# EAGLE board stereo_mix_back_digital (EAGLE 9.6.1), part 1 of 2
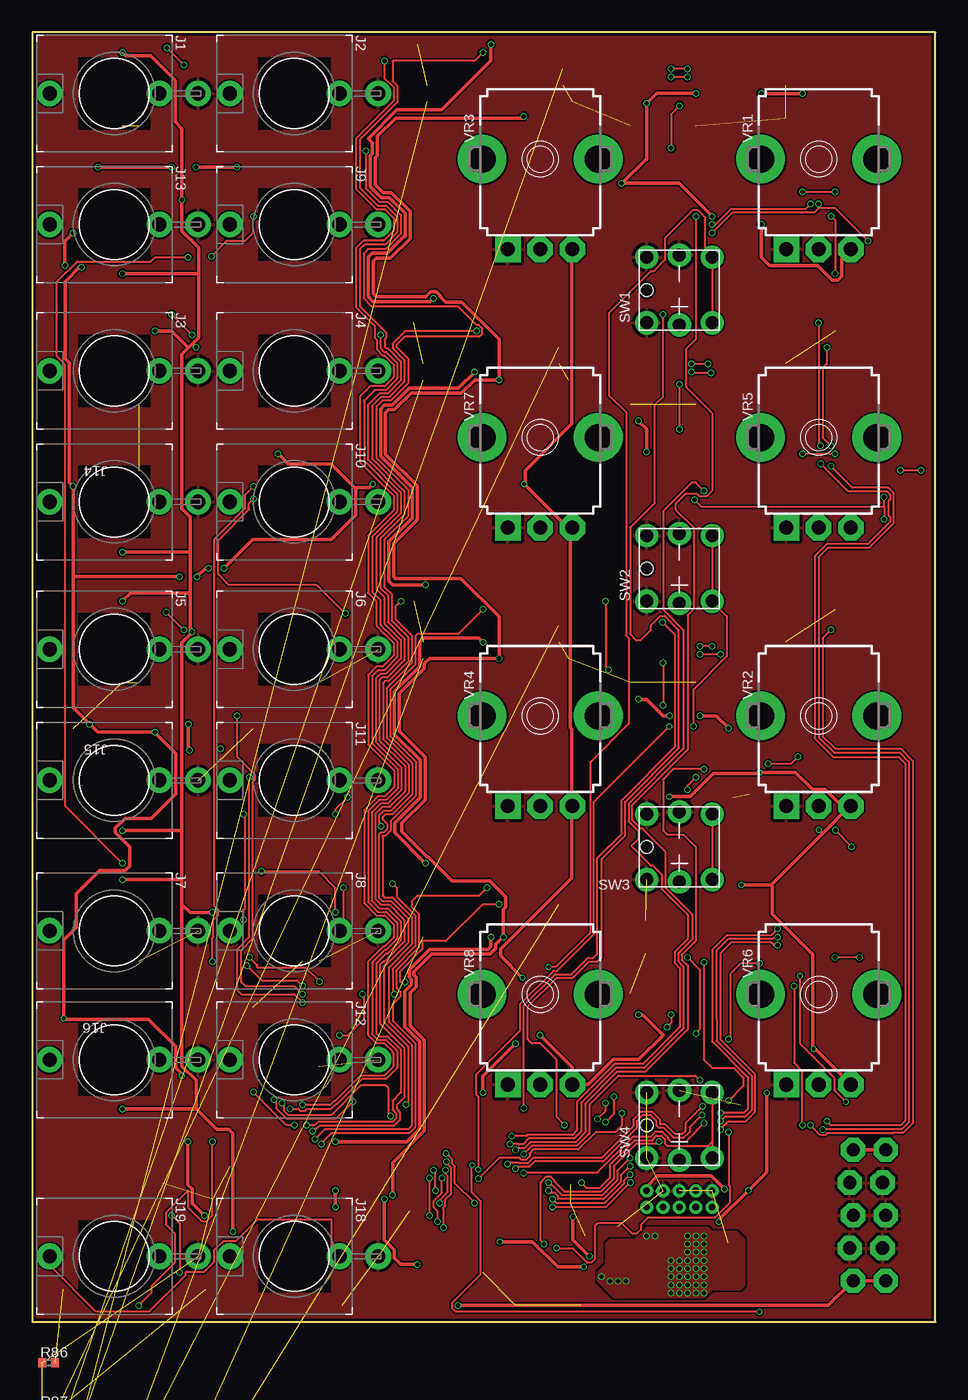
[diagram p0: board, top side]
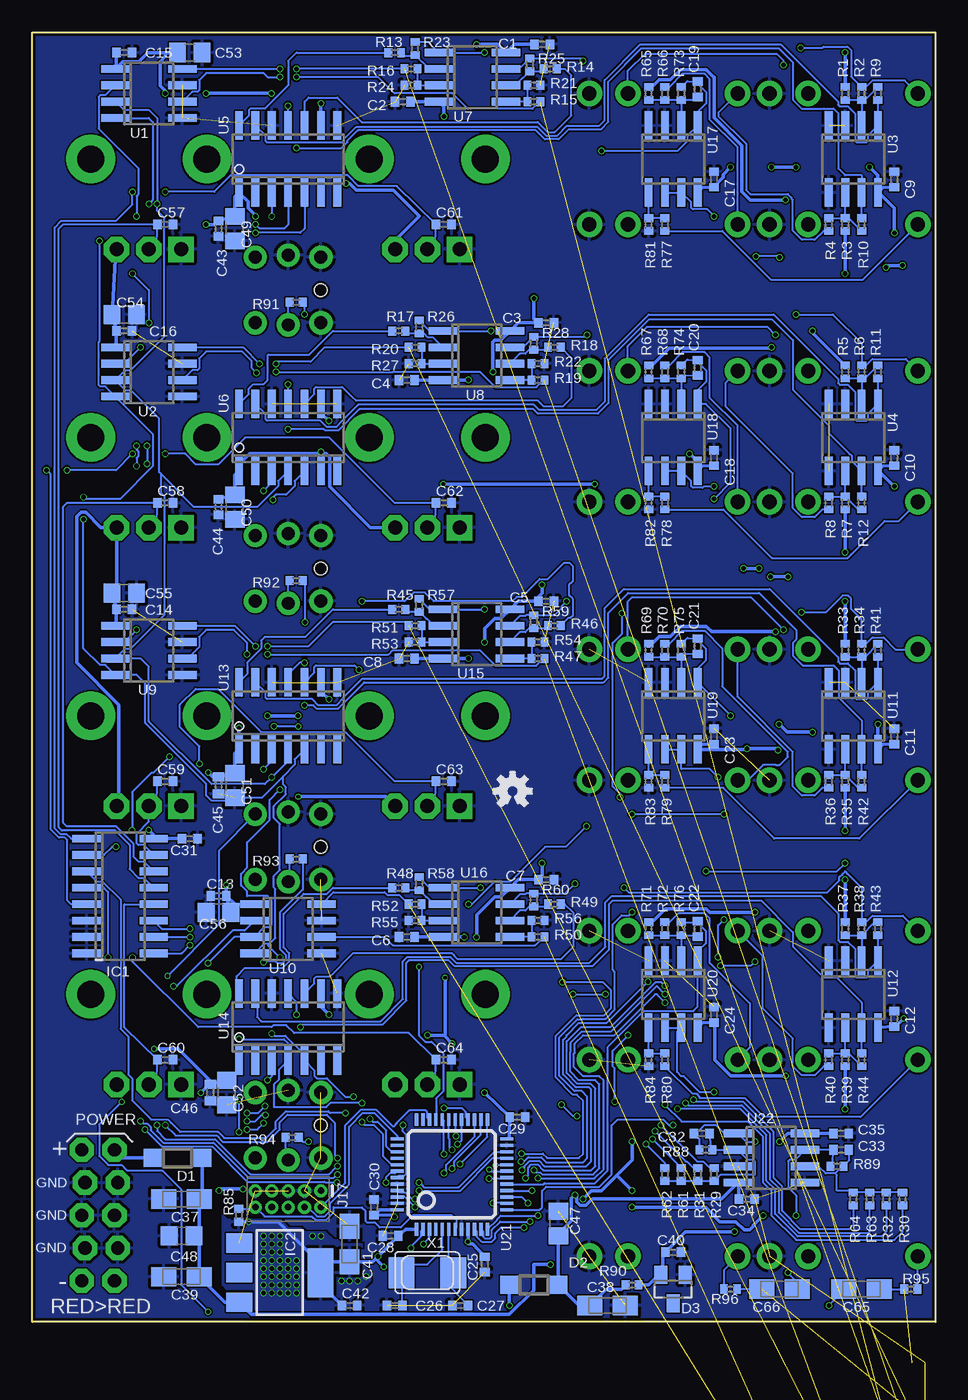
[diagram p1: board, bottom side, seen from below]

Size 70 x 100 mm. Coordinates in mm from the lower left corner, seen from the top.
Outline: 70,100 0,100 0,0 70,0 70,100
Copper layers (1*16): Top 0.035mm / dielectric 1.6mm / Bottom 0.035mm
Design rules "jlcpcb-2layers *": minimum track width 5mil, minimum drill 0.3mm, track to track 5mil, track to pad 5mil, pad to pad 5mil, via to via 5mil, smd to smd 5mil, copper to edge 0.2mm, drill to drill 6mil, minimum pad ring 10mil, minimum via ring 3mil, stop-mask expansion 4mil, vias tented up to drill 20mil, thermal gap 10mil
Net classes: 0 default: width 0.152 mm; 1 power: width 0.254 mm

## Footprints (pad centres in the part's own frame; a part is rotated, then mirrored left to right if it is on the bottom)
C0402 = smd 0.65 x 0.75: 1 -0.6,0; 2 0.6,0
EURO_PWR_HEADER_LOCK = drill 1.016 pad 1.88 octagon: GND1 -2.54,1.143; GND2 -2.54,-1.397; GND3 0,1.397; GND4 0,-1.143; GND5 2.54,1.143; GND6 2.54,-1.397; NEG1 -5.08,1.397; NEG2 -5.08,-1.143; POS1 5.08,1.397; POS2 5.08,-1.143
CASE-A_3216 = smd 1.95 x 1.5: + 1.375,0; - -1.375,0
C0402' = smd 0.7 x 0.9: 1 -0.65,0; 2 0.65,0
C0805 = smd 1.3 x 1.5: 1 -0.95,0; 2 0.95,0
SOD123 = smd 1.4 x 1.4: A 1.9,0; C -1.9,0
SOT23 = smd 1 x 1.4: 1 -0.95,-1.1; 2 0.95,-1.1; 3 0,1.1
SOIC16N = smd 0.6 x 2.2: 1 -4.445,-2.6; 2 -3.175,-2.6; 3 -1.905,-2.6; 4 -0.635,-2.6; 5 0.635,-2.6; 6 1.905,-2.6; 7 3.175,-2.6; 8 4.445,-2.6; 9 4.445,2.6; 10 3.175,2.6; 11 1.905,2.6; 12 0.635,2.6; 13 -0.635,2.6; 14 -1.905,2.6; 15 -3.175,2.6; 16 -4.445,2.6
SOT223 = smd 2 x 1.5: 1 3.15,-2.3; 2 3.15,0; 3 3.15,2.3 | smd 2 x 3.8: 4 -3.15,0
WQP-PJ301M-12_JACK = drill 1.1: P$1_TIP 0,5; P$2_SWITCH 0,-3.5; P$3_SLEEVE 0,-6.5
2X5-PTH-1.27MM = drill 0.508 pad 1: 1 -2.54,-0.635; 2 -2.54,0.635; 3 -1.27,-0.635; 4 -1.27,0.635; 5 0,-0.635; 6 0,0.635; 7 1.27,-0.635; 8 1.27,0.635; 9 2.54,-0.635; 10 2.54,0.635
R0402 = smd 0.6 x 0.7: 1 -0.5,0; 2 0.5,0
PB6149L = drill 1: 1 2.54,-2.54; 2 2.54,2.54; 3 -2.54,-2.54; 4 -2.54,2.54; A 0,-2.7; K 0,2.7 | hole 1: -2.54,0
SOIC8 = smd 0.6 x 2.2: 1 -1.905,-2.6; 2 -0.635,-2.6; 3 0.635,-2.6; 4 1.905,-2.6; 5 1.905,2.6; 6 0.635,2.6; 7 -0.635,2.6; 8 -1.905,2.6
SO-14 = smd 0.6 x 2.2: 1 -3.81,-2.6; 2 -2.54,-2.6; 3 -1.27,-2.6; 4 0,-2.6; 5 1.27,-2.6; 6 2.54,-2.6; 7 3.81,-2.6; 8 3.81,2.6; 9 2.54,2.6; 10 1.27,2.6; 11 0,2.6; 12 -1.27,2.6; 13 -2.54,2.6; 14 -3.81,2.6
LQFP48 = smd 0.254 x 1: 1 -2.75,-4.25; 2 -2.25,-4.25; 3 -1.75,-4.25; 4 -1.25,-4.25; 5 -0.75,-4.25; 6 -0.25,-4.25; 7 0.25,-4.25; 8 0.75,-4.25; 9 1.25,-4.25; 10 1.75,-4.25; 11 2.25,-4.25; 12 2.75,-4.25; 25 2.75,4.25; 26 2.25,4.25; 27 1.75,4.25; 28 1.25,4.25; 29 0.75,4.25; 30 0.25,4.25; 31 -0.25,4.25; 32 -0.75,4.25; 33 -1.25,4.25; 34 -1.75,4.25; 35 -2.25,4.25; 36 -2.75,4.25 | smd 1 x 0.254: 13 4.25,-2.75; 14 4.25,-2.25; 15 4.25,-1.75; 16 4.25,-1.25; 17 4.25,-0.75; 18 4.25,-0.25; 19 4.25,0.25; 20 4.25,0.75; 21 4.25,1.25; 22 4.25,1.75; 23 4.25,2.25; 24 4.25,2.75; 37 -4.25,2.75; 38 -4.25,2.25; 39 -4.25,1.75; 40 -4.25,1.25; 41 -4.25,0.75; 42 -4.25,0.25; 43 -4.25,-0.25; 44 -4.25,-0.75; 45 -4.25,-1.25; 46 -4.25,-1.75; 47 -4.25,-2.25; 48 -4.25,-2.75
9MM_SNAP-IN_POT = drill 1.1 square: 1 -2.5,-7 | drill 1.1 octagon: 2 0,-7; 3 2.5,-7 | drill 2.1 pad 2.794: CHASSIS1 -4.5,0; CHASSIS2 4.5,0
NX5032 = smd 2 x 2.4: P$1 2,0; P$2 -2,0

## Placement (x,y rotation side)
C1  100nF  [C0402]  30.48,99.06 0 bottom
C2  100nF  [C0402]  41.27,94.61 0 bottom
C3  100nF  [C0402]  30.16,77.47 0 bottom
C4  100nF  [C0402]  40.96,73.03 0 bottom
C5  100nF  [C0402]  30.16,55.88 0 bottom
C6  100nF  [C0402]  40.96,29.84 0 bottom
C7  100nF  [C0402]  30.16,34.29 0 bottom
C8  100nF  [C0402]  40.96,51.44 0 bottom
C9  100nF  [C0402]  3.17,88.58 90 bottom
C10  100nF  [C0402]  3.17,66.99 90 bottom
C11  100nF  [C0402]  3.17,45.4 90 bottom
C12  100nF  [C0402]  3.17,23.5 90 bottom
C13  100nF  [C0402]  55.56,33.02 180 bottom
C14  100nF  [C0402]  62.87,55.24 0 bottom
C15  100nF  [C0402]  62.87,98.42 0 bottom
C16  100nF  [C0402]  62.87,76.83 0 bottom
C17  100nF  [C0402]  17.14,88.58 90 bottom
C18  100nF  [C0402]  17.14,66.99 90 bottom
C19  4.7nF  [C0402]  18.41,95.57 90 bottom
C20  4.7nF  [C0402]  18.41,73.98 90 bottom
C21  4.7nF  [C0402]  18.41,52.39 90 bottom
C22  4.7nF  [C0402]  18.41,30.48 90 bottom
C23  100nF  [C0402]  17.14,45.4 90 bottom
C24  100nF  [C0402]  17.14,23.81 90 bottom
C25  100nF  [C0402]  34.92,4.45 270 bottom
C26  22pF  [C0402]  41.91,1.27 0 bottom
C27  22pF  [C0402]  36.83,1.27 0 bottom
C28  100nF  [C0402]  42.23,6.67 180 bottom
C29  100nF  [C0402]  32.38,15.88 0 bottom
C30  100nF  [C0402]  43.5,8.89 90 bottom
C31  100nF  [C0402]  57.78,37.47 0 bottom
C32  220pF  [C0402]  18.1,14.61 180 bottom
C33  220pF  [C0402]  7.3,13.34 180 bottom
C34  100nF  [C0402]  14.61,9.53 180 bottom
C35  100nF  [C0402]  7.3,14.61 0 bottom
C36  EURO_POWER_LOCKFAT-LOCK  [EURO_PWR_HEADER_LOCK]  64.77,8.26 90 bottom
C37  10uF  [CASE-A_3216]  58.42,9.53 0 bottom
C38  10uF  [CASE-A_3216]  25.4,1.27 0 bottom
C39  10uF  [CASE-A_3216]  58.42,3.49 0 bottom
C40  100nF  [C0402]  20.32,5.4 0 bottom
C41  10uF  [CASE-A_3216]  45.4,6.03 270 bottom
C42  100nF  [C0402]  45.4,1.27 0 bottom
C43  100nF  [C0402]  55.56,84.77 270 bottom
C44  100nF  [C0402]  55.56,63.18 270 bottom
C45  100nF  [C0402']  55.56,41.59 270 bottom
C46  100nF  [C0402']  56.2,17.78 270 bottom
C47  22uF  [C0805]  29.21,7.62 270 bottom
C48  22uF  [C0805]  58.42,6.67 180 bottom
C49  10uF  [C0805]  54.29,84.77 270 bottom
C50  10uF  [C0805]  54.29,63.18 270 bottom
C51  10uF  [C0805]  54.29,41.59 270 bottom
C52  10uF  [C0805]  54.93,17.78 270 bottom
C53  10uF  [C0805]  57.78,98.42 0 bottom
C54  10uF  [C0805]  62.87,78.11 0 bottom
C55  10uF  [C0805]  62.87,56.52 0 bottom
C56  10uF  [C0805]  55.56,31.75 180 bottom
C57  100nF  [C0402]  59.69,85.09 0 bottom
C58  100nF  [C0402]  59.69,63.5 0 bottom
C59  100nF  [C0402]  59.69,41.91 0 bottom
C60  100nF  [C0402]  59.69,20.32 0 bottom
C61  100nF  [C0402]  38.1,85.09 0 bottom
C62  100nF  [C0402]  38.1,63.5 0 bottom
C63  100nF  [C0402]  38.1,41.91 0 bottom
C64  100nF  [C0402]  38.1,20.32 0 bottom
C65  10uF  [CASE-A_3216]  5.71,2.54 180 bottom
C66  10uF  [CASE-A_3216]  12.06,2.54 0 bottom
C67  1uF  [C0402]  0.64,-10.79 0 top  (outside the outline)
C68  1uF  [C0402]  0.64,-14.61 0 top  (outside the outline)
C69  1uF  [C0402]  0.64,-18.41 0 top  (outside the outline)
C70  1uF  [C0402]  0.64,-22.23 0 top  (outside the outline)
C71  1uF  [C0402]  0.64,-26.04 0 top  (outside the outline)
C72  1uF  [C0402]  0.64,-29.84 0 top  (outside the outline)
C73  1uF  [C0402]  0.64,-33.66 0 top  (outside the outline)
C74  1uF  [C0402]  0.64,-37.47 0 top  (outside the outline)
D1  B5819W  [SOD123]  58.74,12.7 180 bottom
D2  B5819W  [SOD123]  31.11,2.86 0 bottom
D3  LM4040AIM3-10.0  [SOT23]  20.32,2.54 180 bottom
IC1  4051CD4051  [SOIC16N]  63.18,33.02 270 bottom
IC2  AMS1117-3.3  [SOT223]  50.8,3.81 180 bottom
J1  WQP-PJ301M-12_JACK  [WQP-PJ301M-12_JACK]  6.35,95.25 90 top
J2  WQP-PJ301M-12_JACK  [WQP-PJ301M-12_JACK]  20.32,95.25 90 top
J3  WQP-PJ301M-12_JACK  [WQP-PJ301M-12_JACK]  6.35,73.74 90 top
J4  WQP-PJ301M-12_JACK  [WQP-PJ301M-12_JACK]  20.32,73.74 90 top
J5  WQP-PJ301M-12_JACK  [WQP-PJ301M-12_JACK]  6.35,52.15 90 top
J6  WQP-PJ301M-12_JACK  [WQP-PJ301M-12_JACK]  20.32,52.15 90 top
J7  WQP-PJ301M-12_JACK  [WQP-PJ301M-12_JACK]  6.35,30.32 90 top
J8  WQP-PJ301M-12_JACK  [WQP-PJ301M-12_JACK]  20.32,30.32 90 top
J9  WQP-PJ301M-12_JACK  [WQP-PJ301M-12_JACK]  20.32,85.09 90 top
J10  WQP-PJ301M-12_JACK  [WQP-PJ301M-12_JACK]  20.32,63.58 90 top
J11  WQP-PJ301M-12_JACK  [WQP-PJ301M-12_JACK]  20.32,41.99 90 top
J12  WQP-PJ301M-12_JACK  [WQP-PJ301M-12_JACK]  20.32,20.32 90 top
J13  WQP-PJ301M-12_JACK  [WQP-PJ301M-12_JACK]  6.35,85.09 90 top
J14  WQP-PJ301M-12_JACK  [WQP-PJ301M-12_JACK]  6.35,63.58 90 top
J15  WQP-PJ301M-12_JACK  [WQP-PJ301M-12_JACK]  6.35,41.99 90 top
J16  WQP-PJ301M-12_JACK  [WQP-PJ301M-12_JACK]  6.35,20.32 90 top
J17  CORTEX_DEBUG_PTH  [2X5-PTH-1.27MM]  50.16,9.53 180 bottom
J18  WQP-PJ301M-12_JACK  [WQP-PJ301M-12_JACK]  20.32,5.08 90 top
J19  WQP-PJ301M-12_JACK  [WQP-PJ301M-12_JACK]  6.35,5.08 90 top
LOGO1  OSHW-LOGOS  [OSHW-LOGO-S]  32.77,41.15 0 bottom
R1  91k  [R0402]  6.99,95.25 270 bottom
R2  100k  [R0402]  5.71,95.25 270 bottom
R3  91k  [R0402]  6.99,85.09 90 bottom
R4  100k  [R0402]  8.26,85.09 90 bottom
R5  91k  [R0402]  6.99,73.66 270 bottom
R6  100k  [R0402]  5.71,73.66 270 bottom
R7  91k  [R0402]  6.99,63.5 90 bottom
R8  100k  [R0402]  8.26,63.5 90 bottom
R9  15k  [R0402]  4.45,95.25 270 bottom
R10  15k  [R0402]  5.71,85.09 90 bottom
R11  15k  [R0402]  4.45,73.66 270 bottom
R12  15k  [R0402]  5.71,63.5 90 bottom
R13  47k  [R0402]  41.91,98.42 0 bottom
R14  47k  [R0402]  29.84,97.16 180 bottom
R15  47k  [R0402]  31.11,94.61 180 bottom
R16  47k  [R0402]  40.64,97.16 0 bottom
R17  47k  [R0402]  41.59,76.83 0 bottom
R18  47k  [R0402]  29.53,75.56 180 bottom
R19  47k  [R0402]  30.8,73.03 180 bottom
R20  47k  [R0402]  40.32,75.56 0 bottom
R21  100k  [R0402]  31.11,95.89 180 bottom
R22  100k  [R0402]  30.8,74.3 0 bottom
R23  300k  [R0402]  40.32,98.74 90 bottom
R24  100k  [R0402]  40.64,95.89 180 bottom
R25  300k  [R0402]  31.43,97.47 90 bottom
R26  300k  [R0402]  40.01,77.15 90 bottom
R27  100k  [R0402]  40.32,74.3 180 bottom
R28  300k  [R0402]  31.11,75.88 90 bottom
R29  100k  [R0402]  17.14,11.43 270 bottom
R30  100k  [R0402]  2.54,9.53 90 bottom
R31  100k  [R0402]  18.41,11.43 270 bottom
R32  100k  [R0402]  3.81,9.53 90 bottom
R33  91k  [R0402]  6.99,52.07 270 bottom
R34  100k  [R0402]  5.71,52.07 270 bottom
R35  91k  [R0402]  6.99,41.91 90 bottom
R36  100k  [R0402]  8.26,41.91 90 bottom
R37  91k  [R0402]  6.99,30.48 270 bottom
R38  100k  [R0402]  5.71,30.48 270 bottom
R39  91k  [R0402]  6.99,20.32 90 bottom
R40  100k  [R0402]  8.26,20.32 90 bottom
R41  15k  [R0402]  4.45,52.07 270 bottom
R42  15k  [R0402]  5.71,41.91 90 bottom
R43  15k  [R0402]  4.45,30.48 270 bottom
R44  15k  [R0402]  5.71,20.32 90 bottom
R45  47k  [R0402]  41.59,55.24 0 bottom
R46  47k  [R0402]  29.53,53.98 180 bottom
R47  47k  [R0402]  30.8,51.44 180 bottom
R48  47k  [R0402]  41.59,33.66 0 bottom
R49  47k  [R0402]  29.53,32.38 180 bottom
R50  47k  [R0402]  30.8,29.84 180 bottom
R51  47k  [R0402]  40.32,53.98 0 bottom
R52  47k  [R0402]  40.32,32.38 0 bottom
R53  100k  [R0402]  40.32,52.7 0 bottom
R54  100k  [R0402]  30.8,52.7 180 bottom
R55  100k  [R0402]  40.32,31.11 0 bottom
R56  100k  [R0402]  30.8,31.11 180 bottom
R57  300k  [R0402]  40.01,55.56 90 bottom
R58  300k  [R0402]  40.01,33.97 90 bottom
R59  300k  [R0402]  31.11,54.29 90 bottom
R60  300k  [R0402]  31.11,32.7 90 bottom
R61  100k  [R0402]  19.68,11.43 270 bottom
R62  100k  [R0402]  20.95,11.43 270 bottom
R63  100k  [R0402]  5.08,9.53 90 bottom
R64  100k  [R0402]  6.35,9.53 90 bottom
R65  200k  [R0402]  22.23,95.25 270 bottom
R66  100k  [R0402]  20.95,95.25 270 bottom
R67  200k  [R0402]  22.23,73.66 270 bottom
R68  100k  [R0402]  20.95,73.66 270 bottom
R69  200k  [R0402]  22.23,52.07 270 bottom
R70  100k  [R0402]  20.95,52.07 270 bottom
R71  200k  [R0402]  22.23,30.48 270 bottom
R72  100k  [R0402]  20.95,30.48 270 bottom
R73  33k  [R0402]  19.68,95.25 90 bottom
R74  33k  [R0402]  19.68,73.66 90 bottom
R75  33k  [R0402]  19.68,52.07 90 bottom
R76  33k  [R0402]  19.68,30.48 90 bottom
R77  200k  [R0402]  20.95,85.09 270 bottom
R78  200k  [R0402]  20.95,63.5 270 bottom
R79  200k  [R0402]  20.95,41.91 270 bottom
R80  200k  [R0402]  20.95,20.32 270 bottom
R81  100k  [R0402]  22.23,85.09 90 bottom
R82  100k  [R0402]  22.23,63.5 90 bottom
R83  100k  [R0402]  22.23,41.91 90 bottom
R84  100k  [R0402]  22.23,20.32 90 bottom
R85  10k  [R0402]  53.98,8.26 270 bottom
R86  47k  [R0402]  1.27,-3.17 0 top  (outside the outline)
R87  47k  [R0402]  1.27,-6.99 0 top  (outside the outline)
R88  100k  [R0402]  17.78,13.34 180 bottom
R89  100k  [R0402]  7.62,12.06 180 bottom
R90  470R  [R0402]  23.5,2.86 180 bottom
R91  100R  [R0402]  49.53,79.06 180 bottom
R92  100R  [R0402]  49.53,57.47 180 bottom
R93  100R  [R0402]  49.53,35.88 180 bottom
R94  100R  [R0402]  49.85,14.29 180 bottom
R95  1k  [R0402]  1.91,2.54 0 bottom
R96  1k  [R0402]  15.88,2.54 180 bottom
SW1  [PB6149L]  50.16,80.01 0 top
SW2  [PB6149L]  50.16,58.42 0 top
SW3  [PB6149L]  50.16,36.83 0 top
SW4  [PB6149L]  50.16,15.24 0 top
U1  MCP4822E-SN  [SOIC8]  60.96,95.25 270 bottom
U2  MCP4822E-SN  [SOIC8]  60.96,73.66 270 bottom
U3  MCP6002T-I/SN  [SOIC8]  6.35,90.17 180 bottom
U4  MCP6002T-I/SN  [SOIC8]  6.35,68.58 180 bottom
U5  MCP4922E/SL  [SO-14]  50.16,90.17 0 bottom
U6  MCP4922E/SL  [SO-14]  50.16,68.58 0 bottom
U7  TL072CD  [SOIC8]  35.88,96.52 270 bottom
U8  TL072CD  [SOIC8]  35.56,74.93 270 bottom
U9  MCP4822E-SN  [SOIC8]  60.96,52.07 270 bottom
U10  MCP4822E-SN  [SOIC8]  50.16,30.48 270 bottom
U11  MCP6002T-I/SN  [SOIC8]  6.35,46.99 180 bottom
U12  MCP6002T-I/SN  [SOIC8]  6.35,25.4 180 bottom
U13  MCP4922E/SL  [SO-14]  50.16,46.99 0 bottom
U14  MCP4922E/SL  [SO-14]  50.16,22.86 0 bottom
U15  TL072CD  [SOIC8]  35.56,53.34 270 bottom
U16  TL072CD  [SOIC8]  35.56,31.75 270 bottom
U17  MCP6002T-I/SN  [SOIC8]  20.32,90.17 180 bottom
U18  MCP6002T-I/SN  [SOIC8]  20.32,68.58 180 bottom
U19  MCP6002T-I/SN  [SOIC8]  20.32,46.99 180 bottom
U20  MCP6002T-I/SN  [SOIC8]  20.32,25.4 180 bottom
U21  STM32F030C8T6  [LQFP48]  37.47,11.43 0 bottom
U22  TL072CD  [SOIC8]  12.7,12.7 270 bottom
VR1  [9MM_SNAP-IN_POT]  60.96,90.17 0 top
VR2  [9MM_SNAP-IN_POT]  60.96,46.99 0 top
VR3  [9MM_SNAP-IN_POT]  39.37,90.17 0 top
VR4  [9MM_SNAP-IN_POT]  39.37,46.99 0 top
VR5  [9MM_SNAP-IN_POT]  60.96,68.58 0 top
VR6  [9MM_SNAP-IN_POT]  60.96,25.4 0 top
VR7  [9MM_SNAP-IN_POT]  39.37,68.58 0 top
VR8  [9MM_SNAP-IN_POT]  39.37,25.4 0 top
X1  8MHz  [NX5032]  39.37,3.81 0 bottom

## Library data of the parts
C1-C35 C37-C44 C47-C74 = jhbruhn-cdr; SPICEPREFIX: C
C36 = MusicThingModular
C45 C46 = jhbruhn-cr; SPICEPREFIX: C
D1 D2 X1 = jhbruhn-cdr
D3 = jhbruhn-ref
IC1 IC2 = jhbruhn-ic
J1-J19 SW1-SW4 VR1-VR8 = jhbruhn-physical
LOGO1 = SparkFun-Aesthetics
R1-R85 R88-R90 = jhbruhn-cr; SPICEPREFIX: R
R86 R87 R91-R96 = jhbruhn-cdr; SPICEPREFIX: R
U1 U2 U5 U6 U9 U10 U13 U14 = jhbruhn-dac
U3 U4 U7 U8 U11 U12 U15-U20 U22 = jhbruhn-opamp
U21 = jhbruhn-mcu

## Nets
1_IN_L: J1.P$1_TIP J2.P$2_SWITCH R2.1
1_IN_R: J2.P$1_TIP R4.1
2_IN_L: J3.P$1_TIP J4.P$2_SWITCH R6.1
2_IN_R: J4.P$1_TIP R8.1
2_PAN_CV_IN: J10.P$1_TIP R68.1
2_VOLUME_CV: J14.P$1_TIP R78.2
3_IN_L: J5.P$1_TIP J6.P$2_SWITCH R34.1
3_IN_R: J6.P$1_TIP R36.1
3_PAN_CV_IN: J11.P$1_TIP R70.1
3_VOLUME_CV: J15.P$1_TIP R79.2
4_IN_L: J7.P$1_TIP J8.P$2_SWITCH R38.1
4_IN_R: J8.P$1_TIP R40.1
4_PAN_CV_IN: J12.P$1_TIP R72.1
4_VOLUME_CV: J16.P$1_TIP R80.2
+3V3 [power]: C9.1 C10.1 C11.1 C12.1 C13.1 C14.1 C15.1 C16.1 C17.1 C18.1 C23.1 C24.1 C25.1 C28.1 C29.1 C30.1 C31.1 C41.+ C42.1 C43.1 C44.1 C45.1 C46.1 C49.1 C50.1 C51.1 C52.1 C53.1 C54.1 C55.1 C56.1 IC1.16 IC2.4 J17.1 R85.2 U1.1 U2.1 U3.8 U4.8 U5.1 U5.9 U6.1 U6.9 U9.1 U10.1 U11.8 U12.8 U13.1 U13.9 U14.1 U14.9 U17.8 U18.8 U19.8 U20.8 U21.1 U21.9 U21.24 U21.48 VR1.3 VR2.3 VR3.3 VR4.3 VR5.3 VR6.3 VR7.3 VR8.3
+12V [power]: C1.1 C3.1 C5.1 C7.1 C35.1 C37.+ C39.+ C48.1 D1.C IC2.3 U7.8 U8.8 U15.8 U16.8 U22.8
-12V [power]: C2.2 C4.2 C6.2 C8.2 C34.2 C38.- C47.2 D2.A R90.2 U7.4 U8.4 U15.4 U16.4 U22.4
AREF_-10 [power]: C40.1 D3.2 R1.1 R3.1 R5.1 R7.1 R33.1 R35.1 R37.1 R39.1 R65.1 R67.1 R69.1 R71.1 R90.1
BIAS_DAC1_L: C69.1 R16.1 U1.8
BIAS_DAC1_R: C70.1 R15.1 U1.6
BIAS_DAC2_L: C67.1 R20.1 U2.8
BIAS_DAC2_R: C68.1 R19.1 U2.6
BIAS_DAC3_L: C71.1 R51.1 U9.8
BIAS_DAC3_R: C72.1 R47.1 U9.6
BIAS_DAC4_L: C73.1 R52.1 U10.8
BIAS_DAC4_R: C74.1 R50.1 U10.6
CS_BIAS_DAC_1: U1.2 U21.45
CS_BIAS_DAC_2: U2.2 U21.46
CS_BIAS_DAC_3: U9.2 U21.21
CS_BIAS_DAC_4: U10.2 U21.22
CS_DAC_1: U5.3 U21.29
CS_DAC_2: U6.3 U21.30
CS_DAC_3: U13.3 U21.31
CS_DAC_4: U14.3 U21.32
GND: C1.2 C2.1 C3.2 C4.1 C5.2 C6.1 C7.2 C8.1 C9.2 C10.2 C11.2 C12.2 C13.2 C14.2 C15.2 C16.2 C17.2 C18.2 C23.2 C24.2 C25.2 C26.1 C27.1 C28.2 C29.2 C30.2 C31.2 C34.1 C35.2 C36.GND1 C36.GND2 C36.GND3 C36.GND4 C36.GND5 C36.GND6 C37.- C38.+ C39.- C40.2 C41.- C42.2 C43.2 C44.2 C45.2 C46.2 C47.1 C48.2 C49.2 C50.2 C51.2 C52.2 C53.2 C54.2 C55.2 C56.2 C57.2 C58.2 C59.2 C60.2 C61.2 C62.2 C63.2 C64.2 C67.2 C68.2 C69.2 C70.2 C71.2 C72.2 C73.2 C74.2 D3.1 IC1.6 IC1.7 IC1.8 IC2.1 J1.P$3_SLEEVE J2.P$3_SLEEVE J3.P$3_SLEEVE J4.P$3_SLEEVE J5.P$3_SLEEVE J6.P$3_SLEEVE J7.P$3_SLEEVE J8.P$3_SLEEVE J9.P$3_SLEEVE J10.P$3_SLEEVE J11.P$3_SLEEVE J12.P$3_SLEEVE J13.P$3_SLEEVE J14.P$3_SLEEVE J15.P$3_SLEEVE J16.P$3_SLEEVE J17.3 J17.5 J17.9 J18.P$3_SLEEVE J19.P$3_SLEEVE R21.1 R22.2 R24.2 R27.2 R53.1 R54.1 R55.1 R56.1 R81.1 R82.1 R83.1 R84.1 R86.1 R87.1 SW1.3 SW1.4 SW1.K SW2.3 SW2.4 SW2.K SW3.3 SW3.4 SW3.K SW4.3 SW4.4 SW4.K U1.5 U1.7 U2.5 U2.7 U3.3 U3.4 U3.5 U4.3 U4.4 U4.5 U5.8 U5.12 U6.8 U6.12 U9.5 U9.7 U10.5 U10.7 U11.3 U11.4 U11.5 U12.3 U12.4 U12.5 U13.8 U13.12 U14.8 U14.12 U17.3 U17.4 U18.3 U18.4 U19.3 U19.4 U20.3 U20.4 U21.8 U21.23 U21.44 U21.47 U22.3 U22.5 VR1.1 VR2.1 VR3.1 VR4.1 VR5.1 VR6.1 VR7.1 VR8.1
LED_1: R91.1 U21.43
LED_2: R92.1 U21.28
LED_3: R93.1 U21.2
LED_4: R94.1 U21.3
MISO: U21.40
MOSI: U1.4 U2.4 U5.5 U6.5 U9.4 U10.4 U13.5 U14.5 U21.41
MUX_ADDR_0: IC1.11 U21.25
MUX_ADDR_1: IC1.10 U21.26
MUX_ADDR_2: IC1.9 U21.27
N$1: R13.1 U5.14
N$2: R3.2 R4.2 R10.1 U3.6
N$3: R13.2 R23.1 U7.2
N$4: R9.2 U3.1 U5.13
N$5: R10.2 U3.7 U5.11
N$6: R1.2 R2.2 R9.1 U3.2
N$7: R25.2 R30.1 U7.7
N$8: R23.2 R29.1 U7.1
N$9: R14.2 R25.1 U7.6
N$10: R14.1 U5.10
N$11: C20.1 R67.2 R68.2 R74.1 U18.2
N$12: R91.2 SW1.A
N$13: R92.2 SW2.A
N$14: R16.2 R24.1 U7.3
N$15: R77.1 R81.2 U17.5
N$16: R15.2 R21.2 U7.5
N$17: R78.1 R82.2 U18.5
N$18: R93.2 SW3.A
N$19: R7.2 R8.2 R12.1 U4.6
N$20: R12.2 U4.7 U6.11
N$21: R11.2 U4.1 U6.13
N$22: R5.2 R6.2 R11.1 U4.2
N$23: R17.1 U6.14
N$24: R17.2 R26.1 U8.2
N$25: R26.2 R31.1 U8.1
N$26: R18.2 R28.1 U8.6
N$27: R18.1 U6.10
N$28: R28.2 R32.1 U8.7
N$29: R35.2 R36.2 R42.1 U11.6
N$30: R42.2 U11.7 U13.11
N$31: R41.2 U11.1 U13.13
N$32: C19.1 R65.2 R66.2 R73.1 U17.2
N$33: R33.2 R34.2 R41.1 U11.2
N$34: R45.1 U13.14
N$35: R45.2 R57.1 U15.2
N$36: R57.2 R61.1 U15.1
N$37: R46.2 R59.1 U15.6
N$38: R46.1 U13.10
N$39: R59.2 R63.1 U15.7
N$40: R39.2 R40.2 R44.1 U12.6
N$41: R44.2 U12.7 U14.11
N$42: R94.2 SW4.A
N$43: J18.P$2_SWITCH J19.P$1_TIP R95.2
N$44: R43.2 U12.1 U14.13
N$45: C65.- R86.2 R95.1
N$46: R37.2 R38.2 R43.1 U12.2
N$47 [power]: C36.POS1 C36.POS2 D1.A
N$48 [power]: C36.NEG1 C36.NEG2 D2.C
N$49: R48.1 U14.14
N$50: R48.2 R58.1 U16.2
N$51: R58.2 R62.1 U16.1
N$52: R49.2 R60.1 U16.6
N$53: R49.1 U14.10
N$54: R60.2 R64.1 U16.7
N$55: C22.1 R71.2 R72.2 R76.1 U20.2
N$56: J18.P$1_TIP R96.2
N$57: C66.- R87.2 R96.1
N$59: C21.1 R69.2 R70.2 R75.1 U19.2
N$66: R79.1 R83.2 U19.5
N$67: R20.2 R27.1 U8.3
N$68: R19.2 R22.1 U8.5
N$69: R80.1 R84.2 U20.5
N$70: R51.2 R53.2 U15.3
N$71: R47.2 R54.2 U15.5
N$72: R50.2 R56.2 U16.5
N$73: R52.2 R55.2 U16.3
N$75: C27.2 U21.6 X1.P$1
N$76: C26.2 U21.5 X1.P$2
N$84: J9.P$1_TIP R66.1
N$89: J13.P$1_TIP R77.2
NRST: J17.10 R85.1 U21.7
OUT_L: C32.2 C65.+ R88.2 U22.1
OUT_R: C33.2 C66.+ R89.2 U22.7
PAN_1_POT: C61.1 IC1.1 VR3.2
PAN_2_POT: C62.1 IC1.5 VR7.2
PAN_3_POT: C63.1 IC1.2 VR4.2
PAN_4_POT: C64.1 IC1.4 VR8.2
PAN_CV_1: C19.2 R73.2 U17.1 U21.14
PAN_CV_2: C20.2 R74.2 U18.1 U21.15
PAN_CV_3: C21.2 R75.2 U19.1 U21.16
PAN_CV_4: C22.2 R76.2 U20.1 U21.17
POT_MUX: IC1.3 U21.18
SCK: U1.3 U2.3 U5.4 U6.4 U9.3 U10.3 U13.4 U14.4 U21.39
SUM_L: C32.1 R29.2 R31.2 R61.2 R62.2 R88.1 U22.2
SUM_R: C33.1 R30.2 R32.2 R63.2 R64.2 R89.1 U22.6
SWDCLK: J17.4 U21.37
SWDIO: J17.2 U21.34
SWITCH_1: SW1.1 SW1.2 U21.33
SWITCH_2: SW2.1 SW2.2 U21.19
SWITCH_3: SW3.1 SW3.2 U21.20
SWITCH_4: SW4.1 SW4.2 U21.42
VOL_1_POT: C57.1 IC1.13 VR1.2
VOL_2_POT: C58.1 IC1.14 VR5.2
VOL_3_POT: C59.1 IC1.15 VR2.2
VOL_4_POT: C60.1 IC1.12 VR6.2
VOL_CV_1: U17.6 U17.7 U21.10
VOL_CV_2: U18.6 U18.7 U21.11
VOL_CV_3: U19.6 U19.7 U21.12
VOL_CV_4: U20.6 U20.7 U21.13